# EAGLE board board (EAGLE 9.6.2)
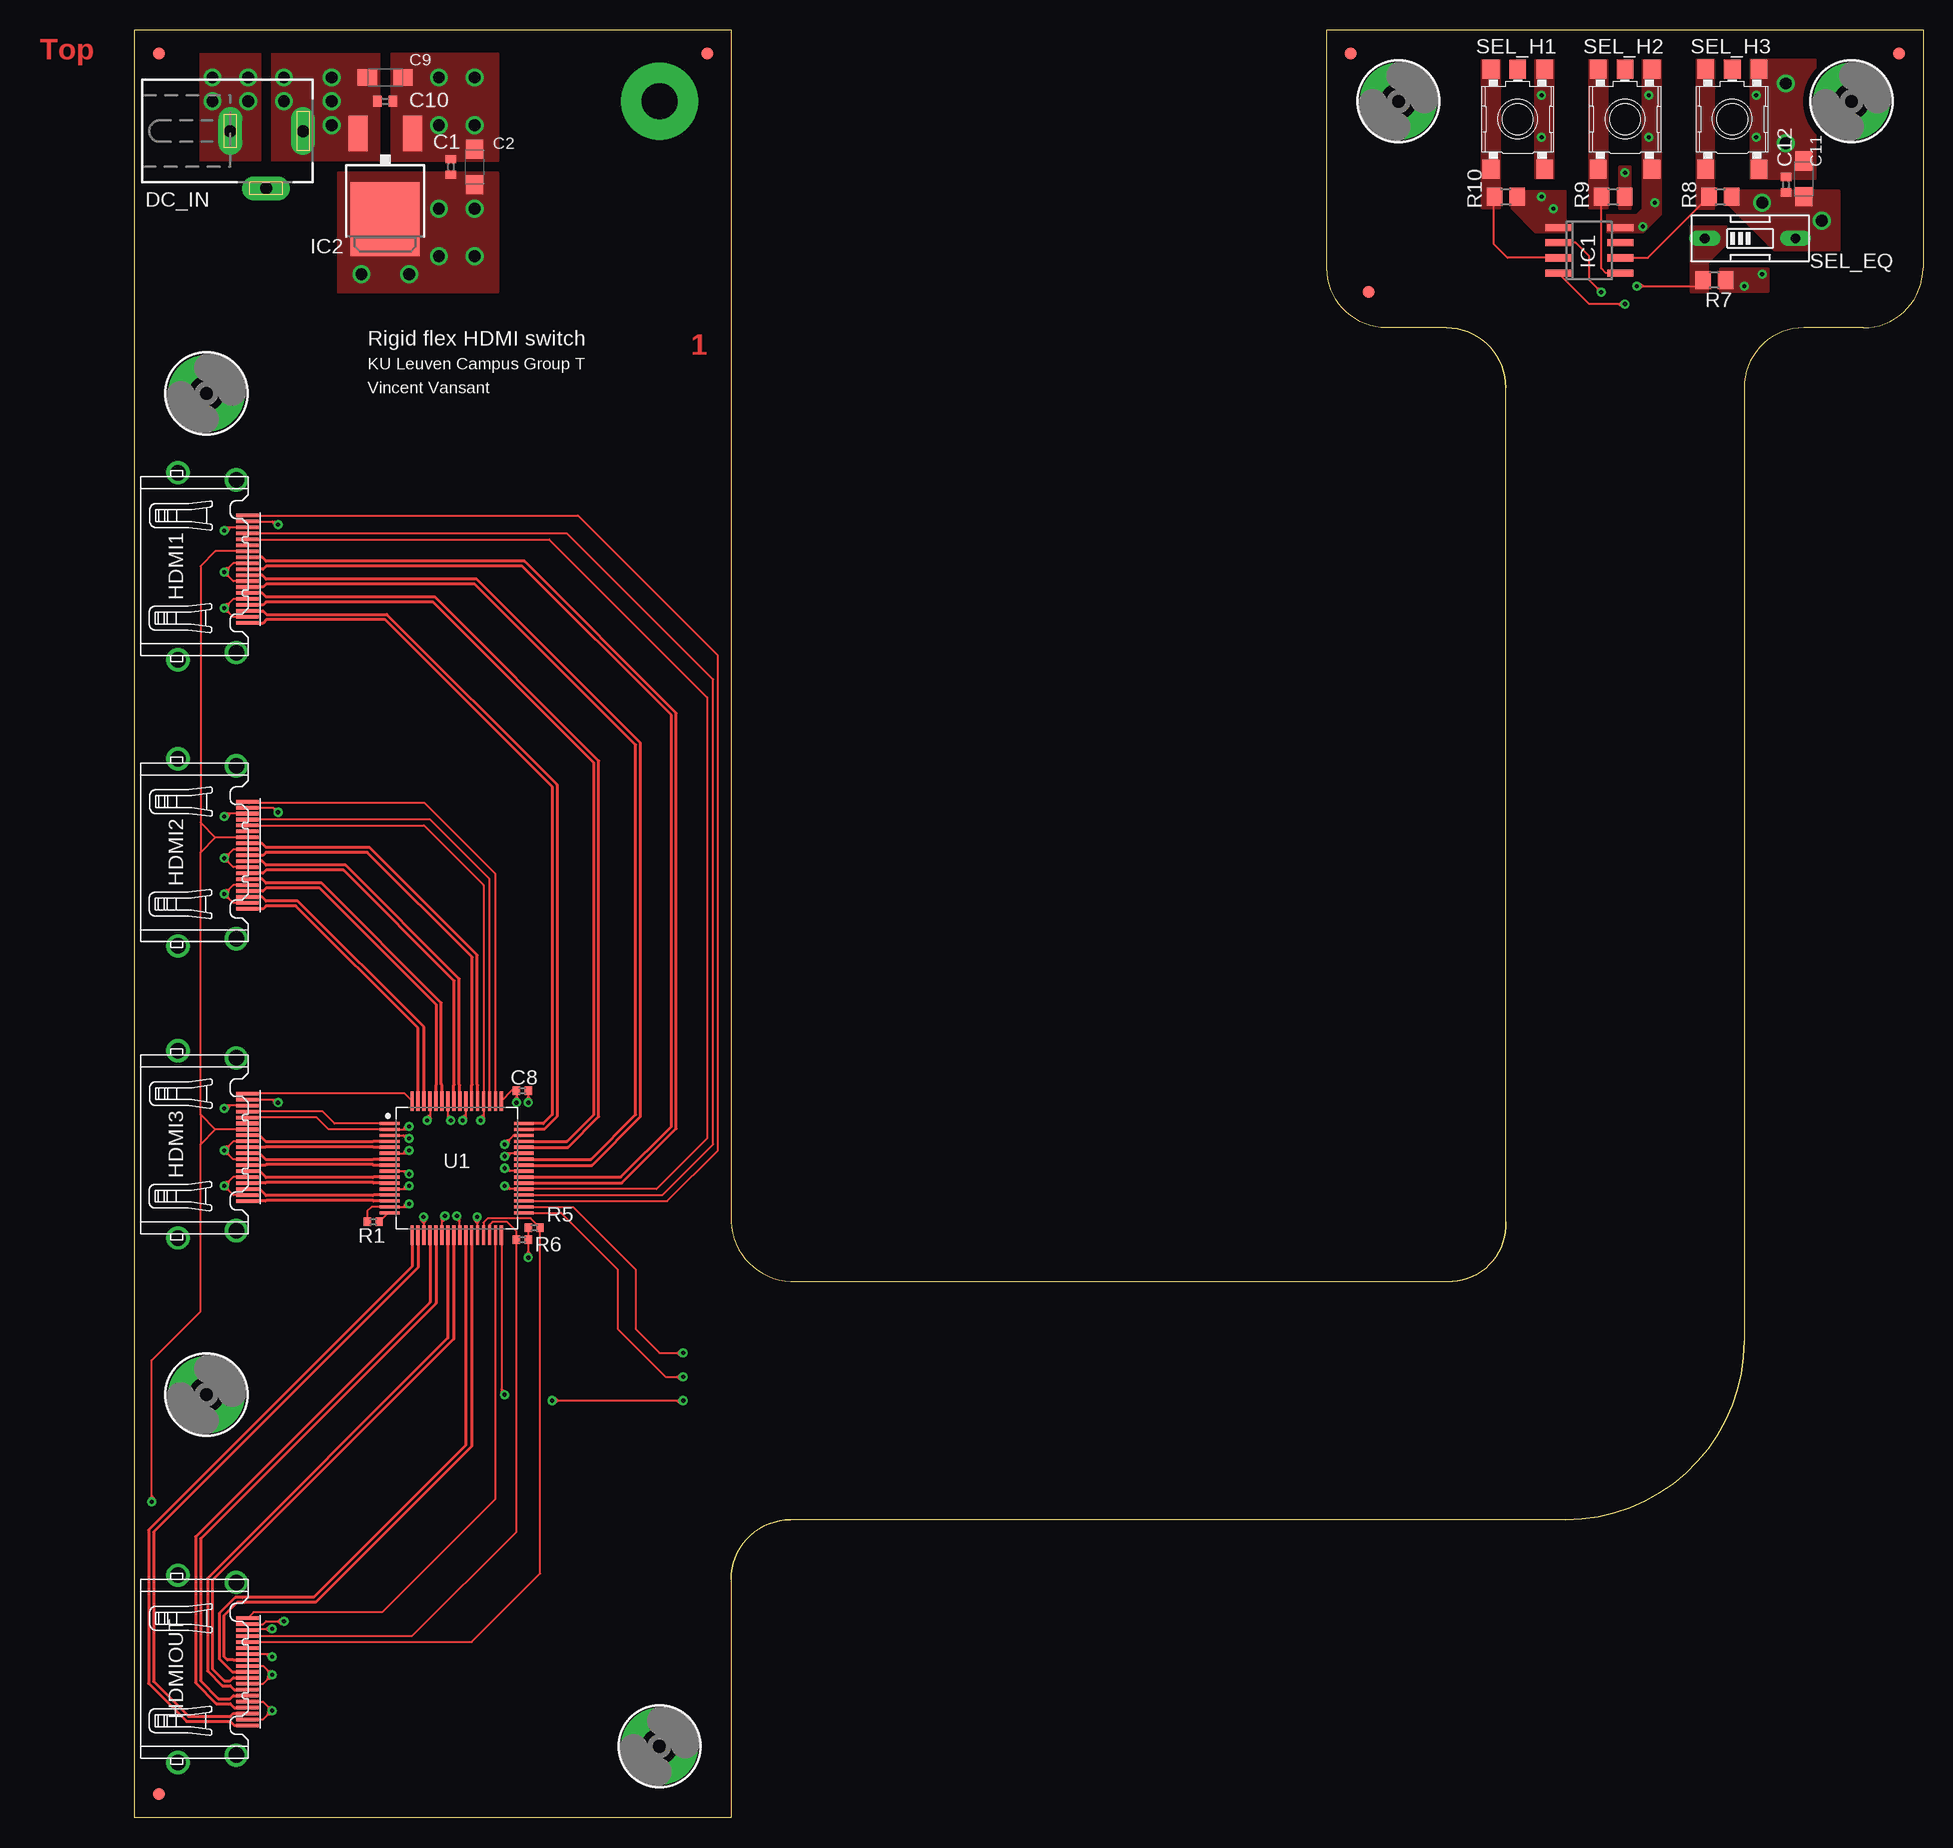
[diagram p0: board, top side]
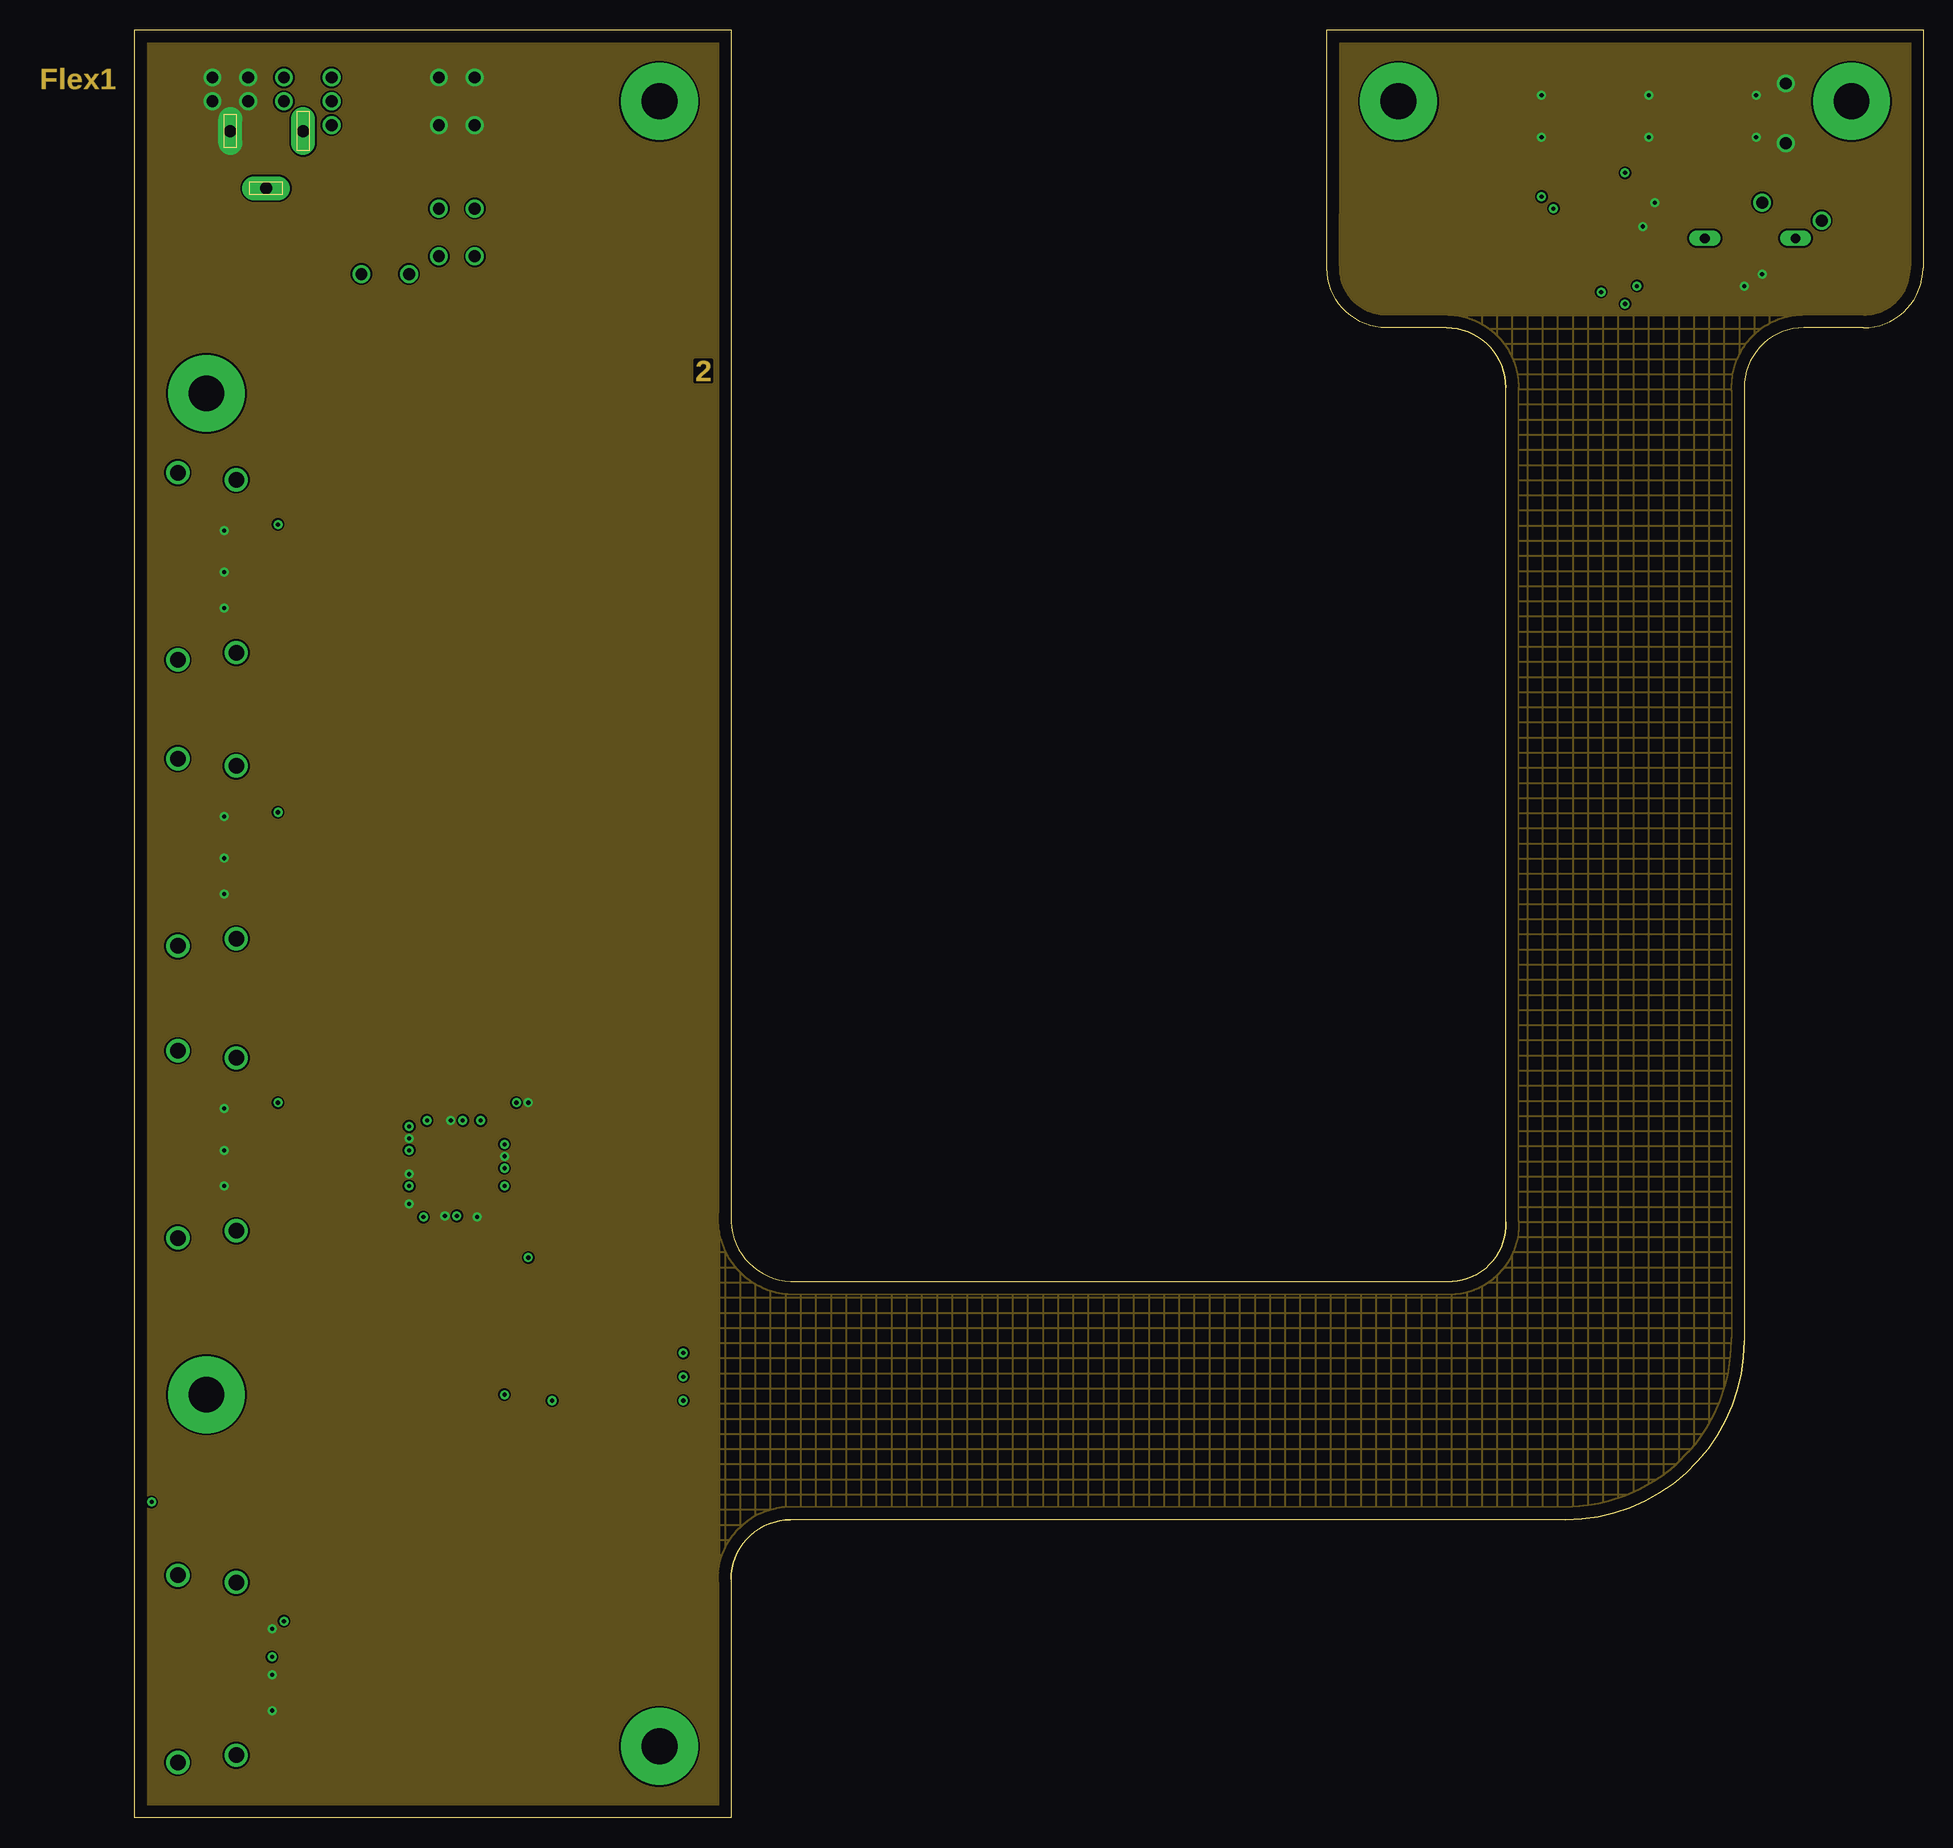
[diagram p1: board, inner layer Flex1]
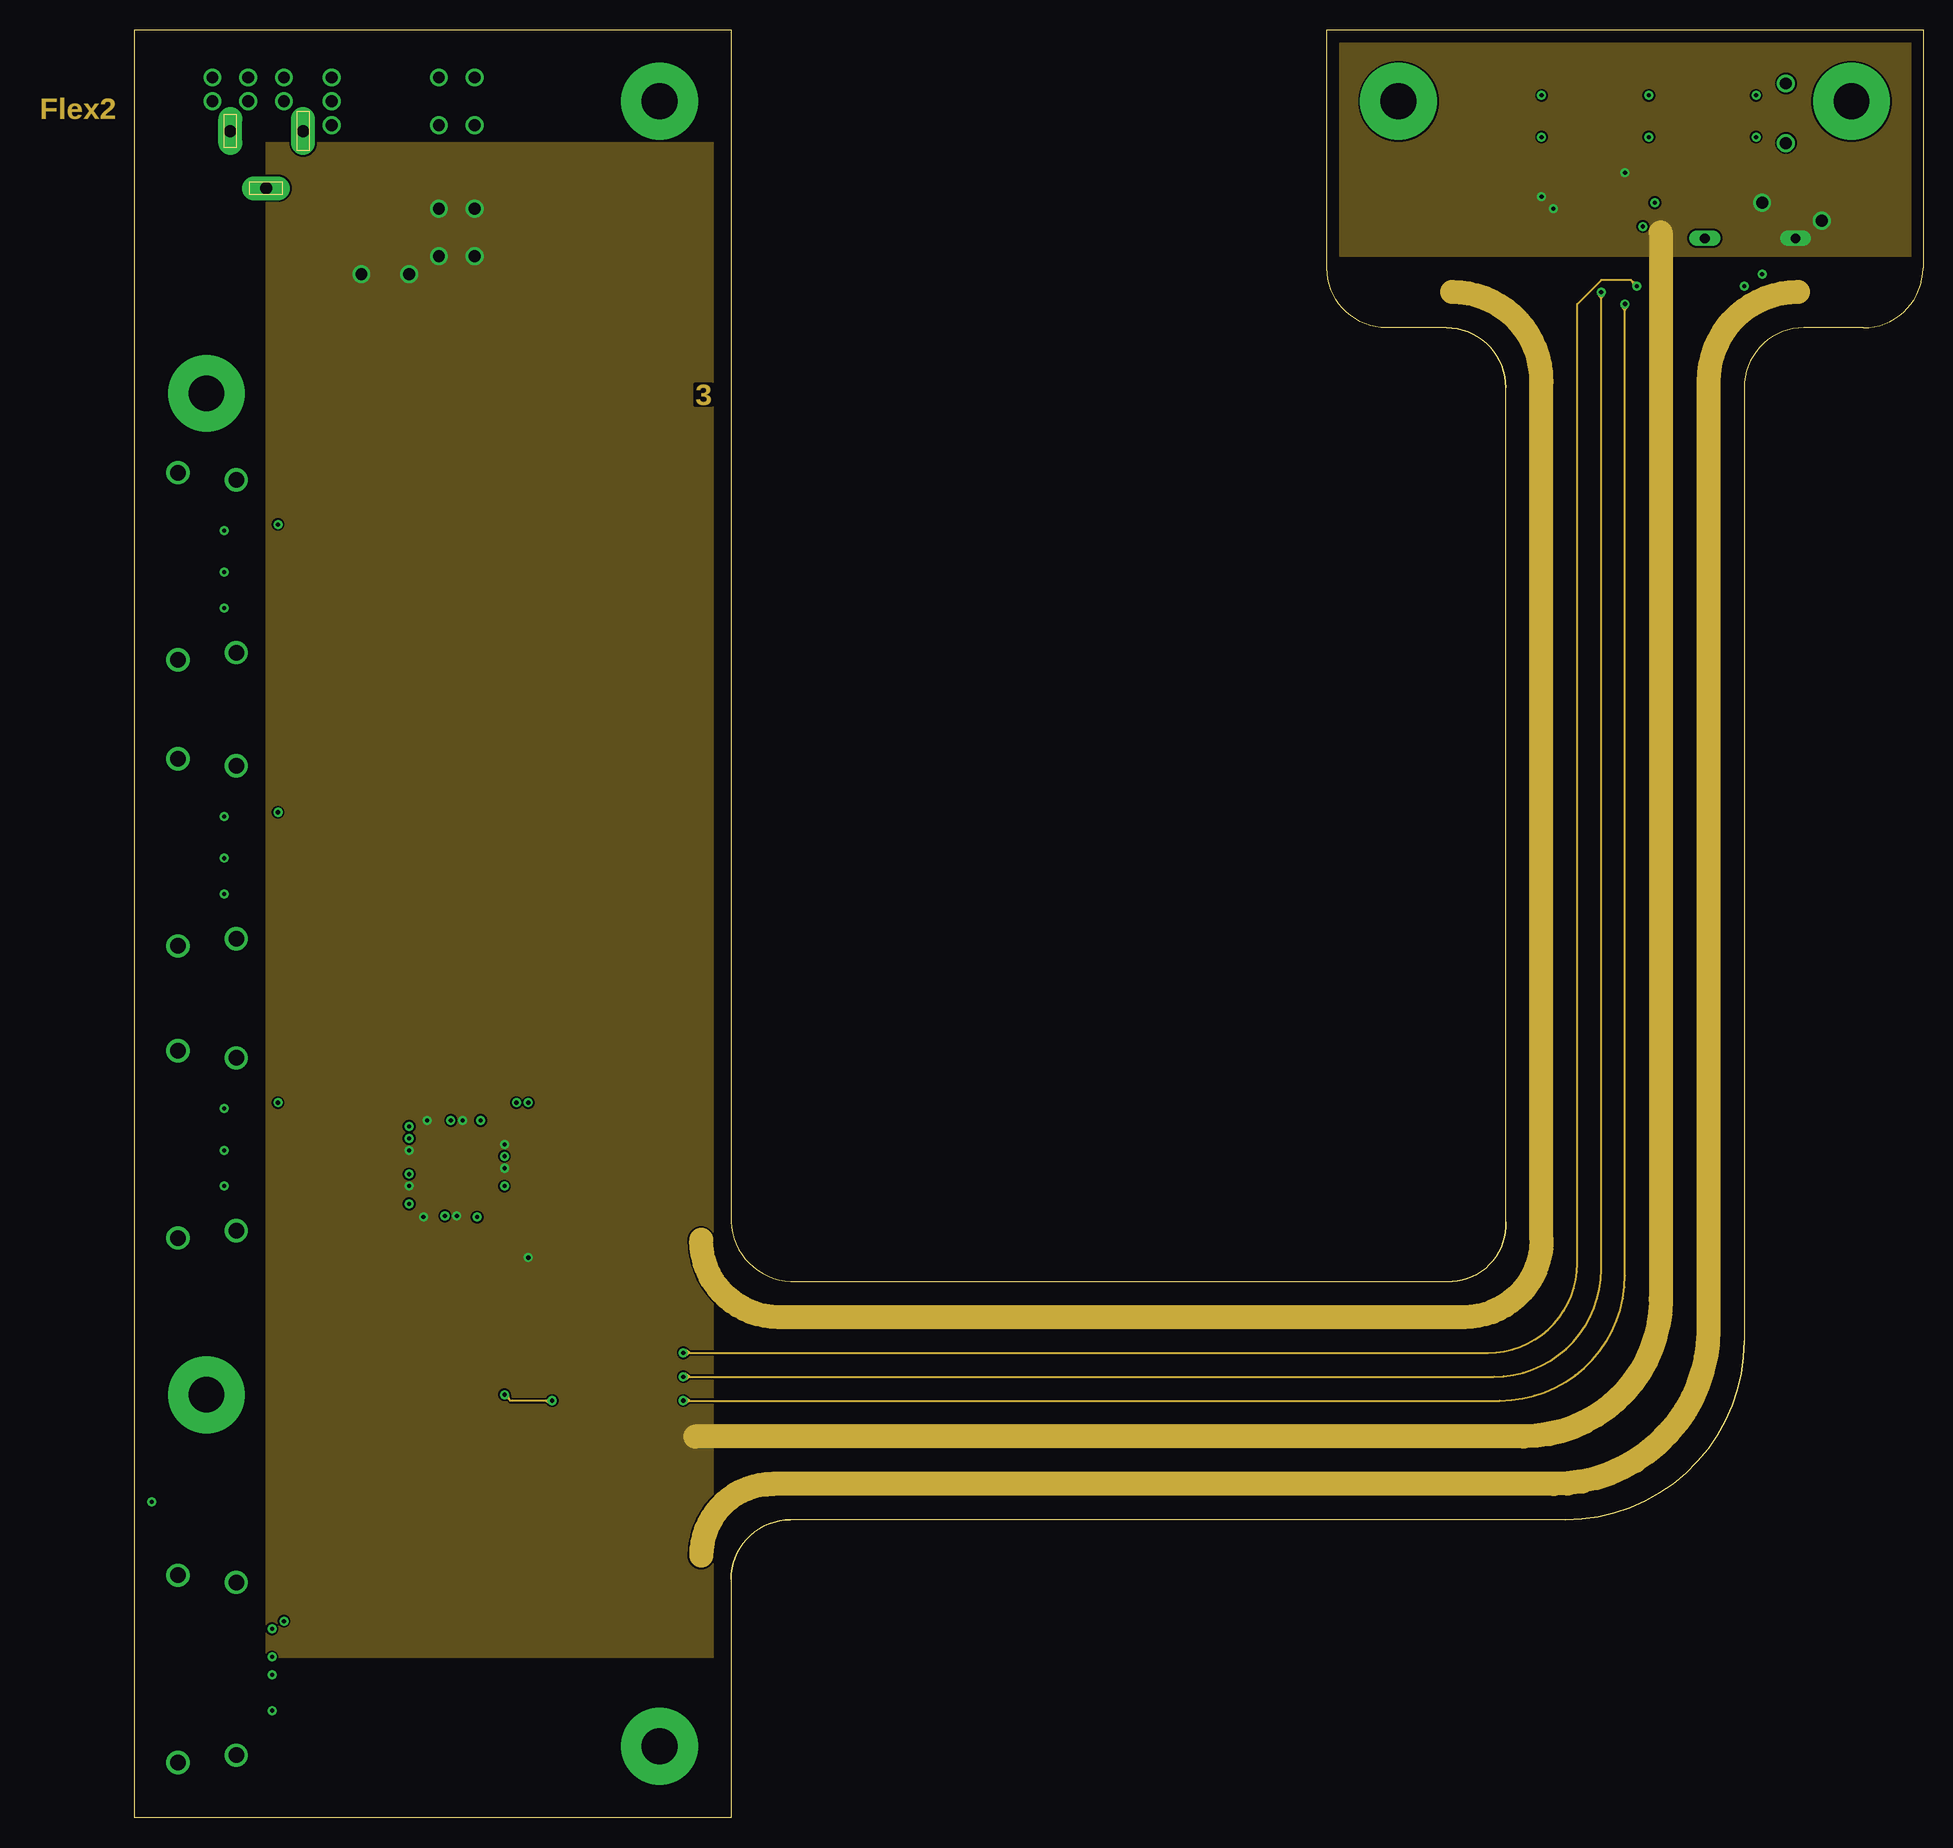
[diagram p2: board, inner layer Flex2]
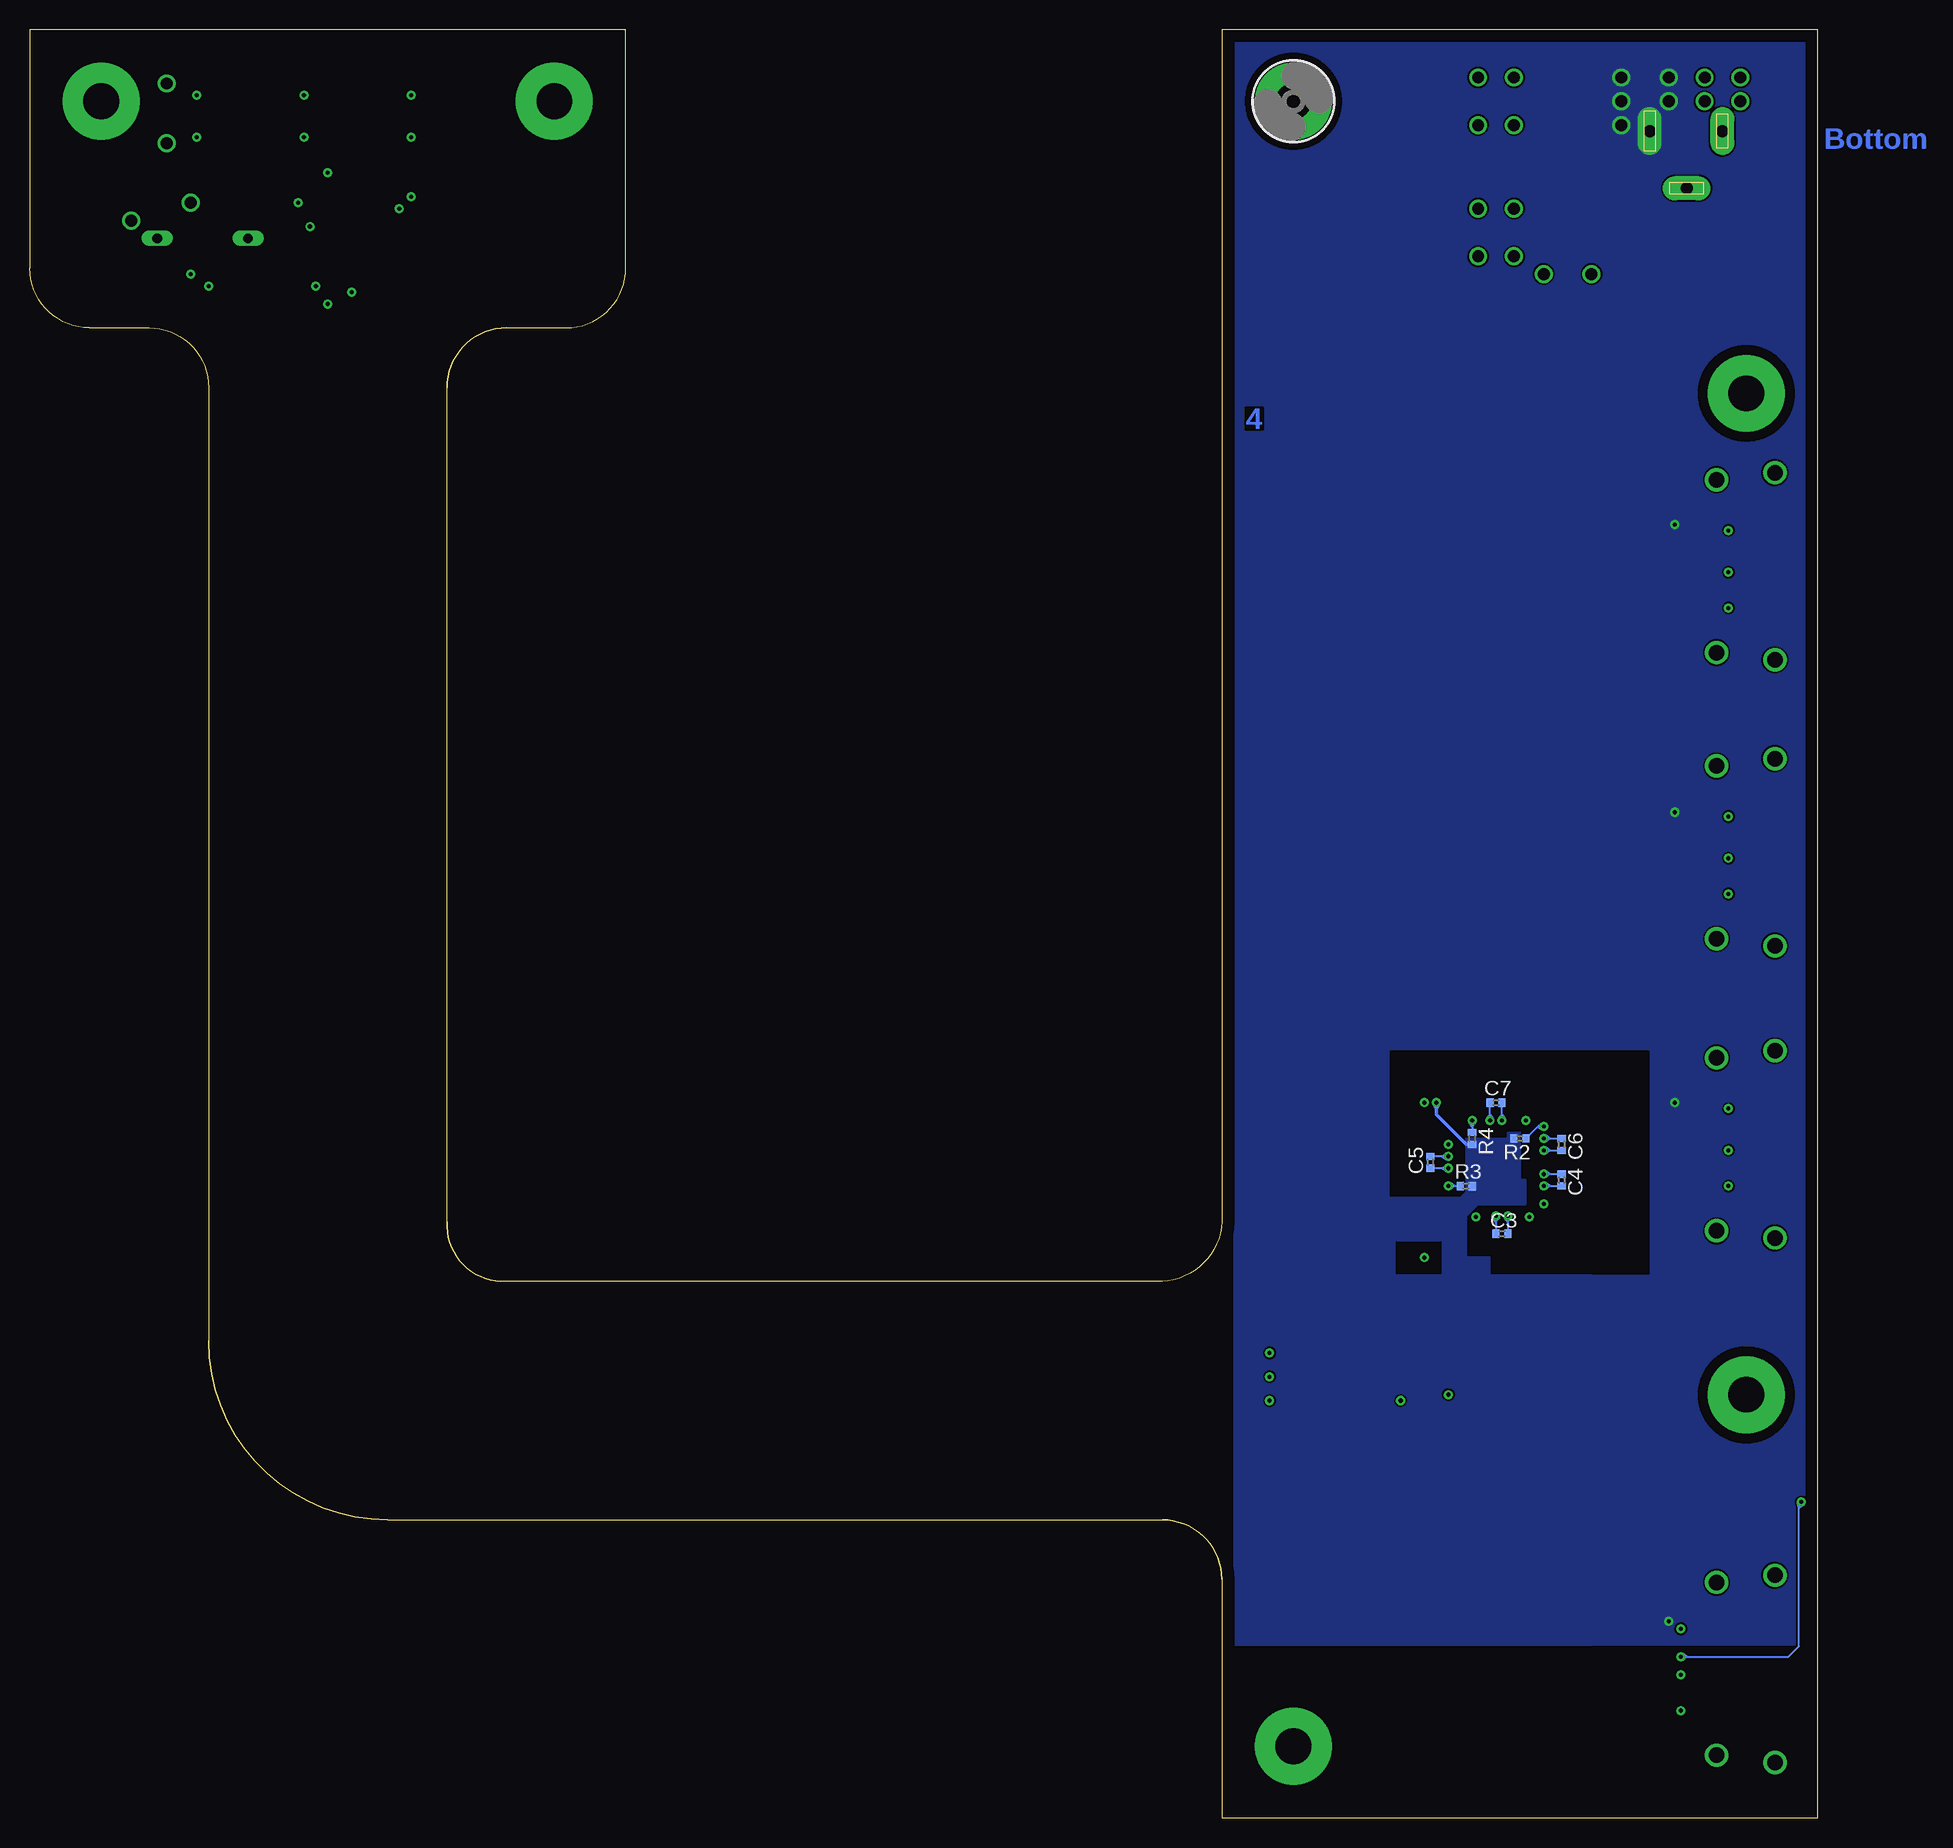
[diagram p3: board, bottom side, seen from below]

Size 150 x 150 mm. Coordinates in mm from the lower left corner, seen from the top.
Outline: 50,20 arc-90 55,25
Outline: 50,50.5 arc90 55,45
Outline: 110,125 arc-90 115,120
Outline: 140,125 arc90 135,120
Outline: 115,50 arc-90 110.5,45
Outline: 120,25 arc90 135,40
Outline: 50,50.5 50,150 0,150 0,0 50,0 50,20
Outline: 50,50.5 arc90 55,45
Outline: 55,45 110.5,45
Outline: 110.5,45 arc90 115,50
Outline: 115,50 115,120
Outline: 115,120 arc90 110,125
Outline: 110,125 105,125 arc-90 100,130 100,150 150,150 150,130 arc-90 145,125 140,125
Outline: 140,125 arc90 135,120
Outline: 135,120 135,40
Outline: 135,40 arc-90 120,25
Outline: 120,25 55,25
Outline: 55,25 arc90 50,20
Copper layers (1+2*15+16): Top 0.03mm / dielectric 0.285mm / Flex1 0.017mm / dielectric 0.05mm / Flex2 0.017mm / dielectric 0.285mm / Bottom 0.03mm
Design rules "default *": minimum track width 6mil, minimum drill 0.35mm, track to track 6mil, track to pad 6mil, pad to pad 6mil, via to via 6mil, smd to smd 6mil, copper to edge 40mil, drill to drill 6mil, minimum pad ring 10mil, minimum via ring 8mil, stop-mask expansion 4mil, vias tented up to drill 0mil, thermal gap 10mil
Net classes: 1 diff100: width 0.26 mm, clearance 0.15 mm

## Footprints (pad centres in the part's own frame; a part is rotated, then mirrored left to right if it is on the bottom)
C0402 = smd 0.7 x 0.9: 1 -0.65,0; 2 0.65,0
SMC_A = smd 1.6 x 1.4: + -1.5,0; - 1.5,0
0402 = smd 0.6 x 0.7: 1 -0.5,0; 2 0.5,0
DCJ0303 = drill 1 pad 2 long: 1 0,3.1; 2 4.8,0; 3 0,-3
FIDUCIAL_1MM = smd 1 x 1: 1 0,0
HDMI_A = smd 0.3 x 1.9: P$1 4.75,3.95; P$2 4.25,3.95; P$3 3.75,3.95; P$4 3.25,3.95; P$5 2.75,3.95; P$6 2.25,3.95; P$7 1.75,3.95; P$8 1.25,3.95; P$9 0.75,3.95; P$10 0.25,3.95; P$11 -0.25,3.95; P$12 -0.75,3.95; P$13 -1.25,3.95; P$14 -1.75,3.95; P$15 -2.25,3.95; P$16 -2.75,3.95; P$17 -3.25,3.95; P$18 -3.75,3.95; P$19 -4.25,3.95 | drill 1.3: P$20 -7.25,3; P$21 7.25,3; P$22 7.85,-1.9; P$23 -7.85,-1.9
SO-08 = smd 0.6 x 2.2: 1 -1.905,-2.6; 2 -0.635,-2.6; 3 0.635,-2.6; 4 1.905,-2.6; 5 1.905,2.6; 6 0.635,2.6; 7 -0.635,2.6; 8 -1.905,2.6
DPACK = smd 1.6 x 3: 1 -2.28,-4.8; 3 2.28,-4.8 | smd 5.8 x 6.2: 4 0,2.38
R0805 = smd 1.3 x 1.5: 1 -0.95,0; 2 0.95,0
EDG-01 = drill 0.813 long: 1 0,-3.81; 2 0,3.81
SKHMPXE010 = smd 1.6 x 1.4: 1 -4.2,2.25; 2 4.2,2.25; 3 -4.2,-2.25; 4 4.2,-2.25; 5 4.2,0
QFP50P1200X1200X120-64 = smd 1.652 x 0.28: 1 -5.632,3.75; 2 -5.632,3.25; 3 -5.632,2.75; 4 -5.632,2.25; 5 -5.632,1.75; 6 -5.632,1.25; 7 -5.632,0.75; 8 -5.632,0.25; 9 -5.632,-0.25; 10 -5.632,-0.75; 11 -5.632,-1.25; 12 -5.632,-1.75; 13 -5.632,-2.25; 14 -5.632,-2.75; 15 -5.632,-3.25; 16 -5.632,-3.75; 33 5.632,-3.75; 34 5.632,-3.25; 35 5.632,-2.75; 36 5.632,-2.25; 37 5.632,-1.75; 38 5.632,-1.25; 39 5.632,-0.75; 40 5.632,-0.25; 41 5.632,0.25; 42 5.632,0.75; 43 5.632,1.25; 44 5.632,1.75; 45 5.632,2.25; 46 5.632,2.75; 47 5.632,3.25; 48 5.632,3.75 | smd 0.28 x 1.652: 17 -3.75,-5.632; 18 -3.25,-5.632; 19 -2.75,-5.632; 20 -2.25,-5.632; 21 -1.75,-5.632; 22 -1.25,-5.632; 23 -0.75,-5.632; 24 -0.25,-5.632; 25 0.25,-5.632; 26 0.75,-5.632; 27 1.25,-5.632; 28 1.75,-5.632; 29 2.25,-5.632; 30 2.75,-5.632; 31 3.25,-5.632; 32 3.75,-5.632; 49 3.75,5.632; 50 3.25,5.632; 51 2.75,5.632; 52 2.25,5.632; 53 1.75,5.632; 54 1.25,5.632; 55 0.75,5.632; 56 0.25,5.632; 57 -0.25,5.632; 58 -0.75,5.632; 59 -1.25,5.632; 60 -1.75,5.632; 61 -2.25,5.632; 62 -2.75,5.632; 63 -3.25,5.632; 64 -3.75,5.632
MOUNTINGHOLE_3.0_PLATED = drill 3 pad 6.452: P$1 0,0

## Placement (x,y rotation side)
C1  10n  [C0402]  26.5,138.5 90 top
C2  47u  [SMC_A]  28.5,138.5 90 top
C3  10n  [0402]  26.5,49 0 bottom
C4  10n  [0402]  21.5,53.5 90 bottom
C5  10n  [0402]  32.5,55 90 bottom
C6  10n  [0402]  21.5,56.5 90 bottom
C7  10n  [0402]  27,60 0 bottom
C8  100n  [0402]  32.5,61 0 top
C9  47u  [SMC_A]  21,146 0 top
C10  100n  [C0402]  21,144 0 top
C11  47u  [SMC_A]  140,137.5 90 top
C12  100n  [C0402]  138.5,137 90 top
DC_IN  [DCJ0303]  11,141.5 270 top
FID1  FIDUCIAL""  [FIDUCIAL_1MM]  2,148 0 top
FID2  FIDUCIAL""  [FIDUCIAL_1MM]  2,2 0 top
FID3  FIDUCIAL""  [FIDUCIAL_1MM]  48,148 0 top
FID4  FIDUCIAL""  [FIDUCIAL_1MM]  102,148 0 top
FID5  FIDUCIAL""  [FIDUCIAL_1MM]  148,148 0 top
FID6  FIDUCIAL""  [FIDUCIAL_1MM]  103.5,128 0 top
HDMI1  HDMI-A  [HDMI_A]  5.5,105 270 top
HDMI2  HDMI-A  [HDMI_A]  5.5,81 270 top
HDMI3  HDMI-A  [HDMI_A]  5.5,56.5 270 top
HDMIOUT  HDMI-A  [HDMI_A]  5.5,12.5 270 top
IC1  PIC12F675SN  [SO-08]  122,131.5 270 top
IC2  LD117ADT-TR  [DPACK]  21,136.5 180 top
R1  4k02  [0402]  20,50 0 top
R2  47k  [0402]  25,57 180 bottom
R3  47k  [0402]  29.5,53 0 bottom
R4  47k  [0402]  29,57 270 bottom
R5  4k7  [0402]  33.5,49.5 180 top
R6  4k7  [0402]  32.5,48.5 0 top
R7  [R0805]  132.5,129 180 top
R8  [R0805]  133,136 0 top
R9  [R0805]  124,136 0 top
R10  [R0805]  115,136 0 top
SEL_EQ  [EDG-01]  135.5,132.5 270 top
SEL_H1  SKHMPSE010  [SKHMPXE010]  116,142.5 90 top
SEL_H2  SKHMPSE010  [SKHMPXE010]  125,142.5 90 top
SEL_H3  SKHMPSE010  [SKHMPXE010]  134,142.5 90 top
U1  TMDS351TQFP64  [QFP50P1200X1200X120-64]  27,54.5 0 top
U$1  MOUNTINGHOLE3.0  [MOUNTINGHOLE_3.0_PLATED]  44,6 0 top
U$2  MOUNTINGHOLE3.0  [MOUNTINGHOLE_3.0_PLATED]  44,144 0 bottom
U$31  MOUNTINGHOLE3.0  [MOUNTINGHOLE_3.0_PLATED]  6,35.5 0 top
U$32  MOUNTINGHOLE3.0  [MOUNTINGHOLE_3.0_PLATED]  6,119.5 0 top
U$33  MOUNTINGHOLE3.0  [MOUNTINGHOLE_3.0_PLATED]  144,144 0 top
U$34  MOUNTINGHOLE3.0  [MOUNTINGHOLE_3.0_PLATED]  106,144 0 top

## Library data of the parts
C1 C2 C9-C12 = rcl; SPICEPREFIX: C
C3-C8 HDMI1-HDMI3 HDMIOUT R1-R6 U1 = labHDE_rev3
DC_IN = con-jack; OC_FARNELL: unknown; OC_NEWARK: unknown
FID1-FID6 U$1 U$2 U$31-U$34 = microbuilder; BOM: EXCLUDE
IC1 = microchip; MF: MICROCHIP; MPN: PIC12F675-E/SN; OC_FARNELL: 9759026; OC_NEWARK: 92C4341
IC2 = v-reg
R7-R10 = rcl; SPICEPREFIX: R
SEL_EQ = special
SEL_H1-SEL_H3 = switch

## Nets
+5V: C8.1 C9.+ C10.1 DC_IN.1 HDMI1.P$18 HDMI2.P$18 HDMI3.P$18 HDMIOUT.P$18 IC2.3 R2.2 R3.2 R4.2 U1.49
CEC: HDMI1.P$13 HDMI2.P$13 HDMI3.P$13 HDMIOUT.P$13
EQ: R7.2 SEL_EQ.1 U1.34
GND: C1.2 C2.- C3.2 C4.2 C5.2 C6.2 C7.2 C8.2 C9.- C10.2 C11.- C12.2 DC_IN.3 HDMI1.P$2 HDMI1.P$5 HDMI1.P$8 HDMI1.P$11 HDMI1.P$17 HDMI2.P$2 HDMI2.P$5 HDMI2.P$8 HDMI2.P$11 HDMI2.P$17 HDMI3.P$2 HDMI3.P$5 HDMI3.P$8 HDMI3.P$11 HDMI3.P$17 HDMIOUT.P$2 HDMIOUT.P$5 HDMIOUT.P$8 HDMIOUT.P$11 HDMIOUT.P$17 IC1.8 IC2.1 R1.1 R7.1 SEL_H1.3 SEL_H1.4 SEL_H2.3 SEL_H2.4 SEL_H3.3 SEL_H3.4 U1.3 U1.9 U1.15 U1.22 U1.28 U1.43 U1.58
H1_CLK_N [diff100]: HDMI1.P$12 U1.38
H1_CLK_P [diff100]: HDMI1.P$10 U1.39
H1_D0_N [diff100]: HDMI1.P$9 U1.41
H1_D0_P [diff100]: HDMI1.P$7 U1.42
H1_D1_N [diff100]: HDMI1.P$6 U1.44
H1_D1_P [diff100]: HDMI1.P$4 U1.45
H1_D2_N [diff100]: HDMI1.P$3 U1.47
H1_D2_P [diff100]: HDMI1.P$1 U1.48
H2_CLK_N [diff100]: HDMI2.P$12 U1.53
H2_CLK_P [diff100]: HDMI2.P$10 U1.54
H2_D0_N [diff100]: HDMI2.P$9 U1.56
H2_D0_P [diff100]: HDMI2.P$7 U1.57
H2_D1_N [diff100]: HDMI2.P$6 U1.59
H2_D1_P [diff100]: HDMI2.P$4 U1.60
H2_D2_N [diff100]: HDMI2.P$3 U1.62
H2_D2_P [diff100]: HDMI2.P$1 U1.63
H3_CLK_N [diff100]: HDMI3.P$12 U1.4
H3_CLK_P [diff100]: HDMI3.P$10 U1.5
H3_D0_N [diff100]: HDMI3.P$9 U1.7
H3_D0_P [diff100]: HDMI3.P$7 U1.8
H3_D1_N [diff100]: HDMI3.P$6 U1.10
H3_D1_P [diff100]: HDMI3.P$4 U1.11
H3_D2_N [diff100]: HDMI3.P$3 U1.13
H3_D2_P [diff100]: HDMI3.P$1 U1.14
HOUT_CLK_N [diff100]: HDMIOUT.P$12 U1.27
HOUT_CLK_P [diff100]: HDMIOUT.P$10 U1.26
HOUT_D0_N [diff100]: HDMIOUT.P$9 U1.24
HOUT_D0_P [diff100]: HDMIOUT.P$7 U1.23
HOUT_D1_N [diff100]: HDMIOUT.P$6 U1.21
HOUT_D1_P [diff100]: HDMIOUT.P$4 U1.20
HOUT_D2_N [diff100]: HDMIOUT.P$3 U1.18
HOUT_D2_P [diff100]: HDMIOUT.P$1 U1.17
N$25: HDMI3.P$19 U1.64
N$26: HDMI2.P$19 U1.50
N$27: HDMI1.P$19 U1.35
N$36: HDMIOUT.P$19 U1.31
N$37: HDMI3.P$16 U1.1
N$38: HDMI3.P$15 R2.1 U1.2
N$39: HDMI2.P$16 U1.51
N$40: HDMI2.P$15 R4.1 U1.52
N$41: HDMI1.P$15 R3.1 U1.37
N$42: HDMI1.P$16 U1.36
N$43: HDMIOUT.P$16 R6.1 U1.30
N$44: HDMIOUT.P$15 R5.1 U1.29
N$45: R1.2 U1.16
N$50: IC1.6 R8.1 SEL_H3.1 SEL_H3.2
N$51: IC1.5 R9.1 SEL_H2.1 SEL_H2.2
N$52: IC1.3 R10.1 SEL_H1.1 SEL_H1.2
S1: IC1.4 U1.32
S2: IC1.2 U1.33
VCC: C1.1 C2.+ C3.1 C4.1 C5.1 C6.1 C7.1 C11.+ C12.1 IC1.1 IC2.4 R5.2 R6.2 R8.2 R9.2 R10.2 SEL_EQ.2 U1.6 U1.12 U1.19 U1.25 U1.40 U1.46 U1.55 U1.61

## Tracks (layer width: path | path; a pad name or v marks a point on that pad's centre or on a via)
+5V  (via drill 0.35, 1)
  Top 0.152: U1.49 31.62,61 C8.1 32,60.52 | 32,60.52 | 32,60.52 v32,60 | HDMIOUT.P$18 10.75,16.25 11,16.5 11.97,16.5 | 11.97,16.5 | 11.97,16.5 v12.5,16.5 | HDMI3.P$18 11.54,60.25 | 11.54,60.25 11.75,60.25 v12,60 | HDMI2.P$18 11.61,84.75 11.63,84.73 | 11.63,84.73 v12,84.36 | HDMI1.P$18 11.54,108.75 | 11.54,108.75 11.75,108.75 v12,108.5 | 32,60.52 | 32,60.52 31.75,60.17 | 31.75,60.17 | 32,60.52 32.25,60.17 | 32.25,60.17 | 32,60.52 31.75,60.17 | 31.75,60.17 | v32,60 31.75,60.17 | 32,60.52 32.25,60.17 | v32,60 32.25,60.17 | 32,60.52 31.75,60.17 | v32,60 31.75,60.17 | 32,60.52 32.25,60.17 | v32,60 32.25,60.17 | 11.97,16.5 12.33,16.25 | 12.33,16.25 | 11.97,16.5 | 11.97,16.5 12.33,16.75 | 12.33,16.75 | 11.97,16.5 12.33,16.25 | 12.33,16.25 | v12.5,16.5 12.33,16.25 | 11.97,16.5 12.33,16.75 | v12.5,16.5 12.33,16.75 | 11.97,16.5 12.33,16.25 | v12.5,16.5 12.33,16.25 | 11.97,16.5 12.33,16.75 | v12.5,16.5 12.33,16.75 | 11.54,60.25 11.73,59.87 v12,60 | 11.54,60.25 11.96,60.3 v12,60 | 11.63,84.73 11.7,84.31 v12,84.36 | 11.63,84.73 12.05,84.65 v12,84.36 | 11.54,108.75 11.73,108.37 v12,108.5 | 11.54,108.75 11.96,108.8 v12,108.5
  Bottom 0.29: v32,60 32,59.48 | 32,59.48 32,59 29.5,56.5 R4.2 | 32,59.48 32.21,59.9 | 32.21,59.9 | 32,59.48 31.79,59.9 | 31.79,59.9 | 32,59.48 32.21,59.9 | 32.21,59.9 | 32,59.48 31.79,59.9 | v32,60 31.79,59.9 | 32,59.48 32.21,59.9 | v32,60 32.21,59.9 | 32,59.48 31.79,59.9 | v32,60 31.79,59.9
  other vias: 16.5,146 16.5,142 12.5,146 12.5,144 16.5,144
  pour Bottom (no thermals): 25,57.5 25,52 29.5,52 29.5,57 26,57 26,57.5
  pour Top (no thermals): 20.5,148 20.5,139 11.5,139 11.5,148
  pour Bottom: 31.5,45 27.5,45 27.5,47 29.5,47 29.5,50.5 28.5,51.5 24.5,51.5 24.5,53.5 29.5,53.5 29.5,52.5 30,52 36,52 36,48.5 31.5,48.5
  pour Bottom (no thermals): 36,52 36,64.5 1,64.5 1,149 49,149 49,14.5 19,14.5 19,45.5 35.5,45.5 35.5,52
  pour Bottom: 19.5,45.5 14,45.5 14,65 1,65 1,14.5 19.5,14.5
CEC  (via drill 0.35)
  Top 0.152: HDMI1.P$13 6.75,106.25 5.5,105 5.5,83.5 | 6.75,82.25 5.5,83.5 | HDMI2.P$13 6.75,82.25 | 5.5,83.5 5.5,81 | 6.75,82.25 5.5,81 | HDMI3.P$13 6.75,57.75 | 5.5,59 6.75,57.75 | 5.5,59 5.5,81 | 5.5,59 5.5,56.5 | 6.75,57.75 5.5,56.5 | 5.5,56.5 5.5,42.5 1.39,38.39 1.39,27.02 | HDMIOUT.P$13 11.04,13.75 | 11.04,13.75 11.25,13.75 v11.5,13.5 | v1.39,26.5 1.39,27.02 | 1.39,27.02 | 11.04,13.75 11.23,13.37 v11.5,13.5 | 11.04,13.75 11.46,13.8 v11.5,13.5 | 1.39,27.02 | 1.39,27.02 1.15,26.67 | 1.15,26.67 | 1.39,27.02 1.64,26.67 | 1.64,26.67 | 1.39,27.02 1.15,26.67 | 1.15,26.67 | v1.39,26.5 1.15,26.67 | 1.39,27.02 1.64,26.67 | v1.39,26.5 1.64,26.67 | 1.39,27.02 1.15,26.67 | v1.39,26.5 1.15,26.67 | 1.39,27.02 1.64,26.67 | v1.39,26.5 1.64,26.67
  Bottom 0.152: v11.5,13.5 10.97,13.5 | 10.97,13.5 | 10.97,13.5 2.5,13.5 1.59,14.41 1.59,26.01 | 1.59,26.01 1.59,26.3 v1.39,26.5 | 10.97,13.5 11.33,13.25 | 11.33,13.25 | 10.97,13.5 | 10.97,13.5 11.33,13.75 | 11.33,13.75 | 10.97,13.5 11.33,13.25 | 11.33,13.25 | v11.5,13.5 11.33,13.25 | 10.97,13.5 11.33,13.75 | v11.5,13.5 11.33,13.75 | 10.97,13.5 11.33,13.25 | v11.5,13.5 11.33,13.25 | 10.97,13.5 11.33,13.75 | v11.5,13.5 11.33,13.75 | 1.59,26.01 1.69,26.43 v1.39,26.5 | 1.59,26.01 1.23,26.25 v1.39,26.5
EQ  (via drill 0.35)
  Top 0.152: R7.2 131.05,128.5 126.53,128.5 | U1.34 36.75,51.25 42,46 42,41 44,39 45.48,39 | 45.48,39 | 45.48,39 v46,39 | v126,128.5 126.53,128.5 | 126.53,128.5 | 45.48,39 45.83,38.75 | 45.83,38.75 | 45.48,39 | 45.48,39 45.83,39.25 | 45.83,39.25 | 45.48,39 45.83,38.75 | 45.83,38.75 | v46,39 45.83,38.75 | 45.48,39 45.83,39.25 | v46,39 45.83,39.25 | 45.48,39 45.83,38.75 | v46,39 45.83,38.75 | 45.48,39 45.83,39.25 | v46,39 45.83,39.25 | 126.53,128.5 126.17,128.75 | 126.17,128.75 | 126.53,128.5 | 126.53,128.5 126.17,128.25 | 126.17,128.25 | 126.53,128.5 126.17,128.75 | 126.17,128.75 | v126,128.5 126.17,128.75 | 126.53,128.5 126.17,128.25 | v126,128.5 126.17,128.25 | 126.53,128.5 126.17,128.75 | v126,128.5 126.17,128.75 | 126.53,128.5 126.17,128.25 | v126,128.5 126.17,128.25
  Flex2 0.152: v46,39 46.52,39 | 46.52,39 | 46.52,39 113.5,39 arc90 121,46.5 121,127 123,129 125.5,129 125.63,128.87 | 125.63,128.87 v126,128.5 | 46.52,39 | 46.52,39 46.17,39.25 | 46.17,39.25 | 46.52,39 46.17,38.75 | 46.17,38.75 | 46.52,39 46.17,39.25 | 46.17,39.25 | v46,39 46.17,39.25 | 46.52,39 46.17,38.75 | v46,39 46.17,38.75 | 46.52,39 46.17,39.25 | v46,39 46.17,39.25 | 46.52,39 46.17,38.75 | v46,39 46.17,38.75 | 125.63,128.87 125.7,128.45 v126,128.5 | 125.63,128.87 126.05,128.8 v126,128.5
  pour Top (no thermals): 132,128 132,130.5 133.5,132 133.5,133.5 130.5,133.5 130.5,128
GND  (via drill 0.35, 1)
  Top 0.152: R1.1 19.5,50.9 19.85,51.25 U1.15 22.54,51.25 | U1.28 28.75,49.88 | 28.75,49.88 28.75,50.35 v28.7,50.4 | C8.2 33,60.52 | 33,60.52 | 33,60.52 v33,60 | U1.43 31.46,55.75 | 31.46,55.75 31.25,55.75 v31,55.5 | U1.22 25.75,50.04 | 25.75,50.04 25.75,50.25 v26,50.5 | U1.58 26.25,58.96 | 26.25,58.96 26.25,58.75 v26.5,58.5 | U1.3 22.54,57.25 | 22.54,57.25 22.75,57.25 v23,57 | U1.9 22.54,54.25 | 22.54,54.25 22.75,54.25 v23,54 | 22.54,51.25 22.75,51.25 v23,51.5 | HDMI3.P$2 8.25,52.25 7.87,52.63 | 7.87,52.63 v7.5,53 | HDMI3.P$5 8.25,53.75 7.87,53.37 | 7.87,53.37 v7.5,53 | HDMI3.P$8 8.25,55.25 7.87,55.63 | 7.87,55.63 v7.5,56 | HDMI3.P$11 8.25,56.75 7.87,56.37 | 7.87,56.37 v7.5,56 | HDMI3.P$17 7.96,59.75 | 7.96,59.75 7.75,59.75 v7.5,59.5 | HDMI2.P$2 8.25,76.75 7.87,77.13 | 7.87,77.13 v7.5,77.5 | HDMI2.P$5 8.25,78.25 7.87,77.87 | 7.87,77.87 v7.5,77.5 | HDMI2.P$8 8.25,79.75 7.87,80.13 | 7.87,80.13 v7.5,80.5 | HDMI2.P$11 8.25,81.25 7.87,80.87 | 7.87,80.87 v7.5,80.5 | HDMI2.P$17 7.96,84.25 | 7.96,84.25 7.75,84.25 v7.5,84 | HDMI1.P$2 8.25,100.75 7.87,101.13 | 7.87,101.13 v7.5,101.5 | HDMI1.P$5 8.25,102.25 7.87,101.87 | 7.87,101.87 v7.5,101.5 | HDMI1.P$8 8.25,103.75 7.87,104.13 | 7.87,104.13 v7.5,104.5 | HDMI1.P$11 8.25,105.25 7.87,104.87 | 7.87,104.87 v7.5,104.5 | HDMI1.P$17 7.96,108.25 | 7.96,108.25 7.75,108.25 v7.5,108 | HDMIOUT.P$17 9.56,15.86 10.97,15.86 | 10.97,15.86 | 10.97,15.86 v11.5,15.86 | HDMIOUT.P$11 10.75,12.75 11.13,12.37 | 11.13,12.37 v11.5,12 | HDMIOUT.P$8 10.75,11.25 11.13,11.63 | 11.13,11.63 v11.5,12 | HDMIOUT.P$5 10.75,9.75 11.13,9.37 | 11.13,9.37 v11.5,9 | HDMIOUT.P$2 10.75,8.25 11.13,8.63 | 11.13,8.63 v11.5,9 | 28.75,49.88 28.96,50.25 v28.7,50.4 | 28.75,49.88 28.47,50.2 v28.7,50.4
  Top 0.152: 33,60.52 | 33,60.52 32.75,60.17 | 32.75,60.17 | 33,60.52 33.25,60.17 | 33.25,60.17 | 33,60.52 32.75,60.17 | 32.75,60.17 | v33,60 32.75,60.17 | 33,60.52 33.25,60.17 | v33,60 33.25,60.17 | 33,60.52 32.75,60.17 | v33,60 32.75,60.17 | 33,60.52 33.25,60.17 | v33,60 33.25,60.17 | 31.46,55.75 31.04,55.8 v31,55.5 | 31.46,55.75 31.27,55.37 v31,55.5 | 25.75,50.04 26.13,50.23 v26,50.5 | 25.75,50.04 25.7,50.47 v26,50.5 | 26.25,58.96 26.2,58.53 v26.5,58.5 | 26.25,58.96 26.63,58.77 v26.5,58.5 | 22.54,57.25 22.73,56.87 v23,57 | 22.54,57.25 22.96,57.3 v23,57 | 22.54,54.25 22.73,53.87 v23,54 | 22.54,54.25 22.96,54.3 v23,54 | 22.54,51.25 22.96,51.2 v23,51.5 | 22.54,51.25 22.73,51.63 v23,51.5 | 7.87,52.63 7.8,53.05 v7.5,53 | 7.87,52.63 7.45,52.7 v7.5,53 | 7.87,53.37 7.45,53.3 v7.5,53 | 7.87,53.37 7.8,52.95 v7.5,53 | 7.87,55.63 7.8,56.05 v7.5,56 | 7.87,55.63 7.45,55.7 v7.5,56 | 7.87,56.37 7.45,56.3 v7.5,56 | 7.87,56.37 7.8,55.95 v7.5,56 | 7.96,59.75 7.54,59.8 v7.5,59.5 | 7.96,59.75 7.77,59.37 v7.5,59.5 | 7.87,77.13 7.8,77.55 v7.5,77.5 | 7.87,77.13 7.45,77.2 v7.5,77.5 | 7.87,77.87 7.45,77.8 v7.5,77.5 | 7.87,77.87 7.8,77.45 v7.5,77.5 | 7.87,80.13 7.8,80.55 v7.5,80.5 | 7.87,80.13 7.45,80.2 v7.5,80.5 | 7.87,80.87 7.45,80.8 v7.5,80.5 | 7.87,80.87 7.8,80.45 v7.5,80.5 | 7.96,84.25 7.54,84.3 v7.5,84 | 7.96,84.25 7.77,83.87 v7.5,84 | 7.87,101.13 7.8,101.55 v7.5,101.5 | 7.87,101.13 7.45,101.2 v7.5,101.5 | 7.87,101.87 7.45,101.8 v7.5,101.5 | 7.87,101.87 7.8,101.45 v7.5,101.5 | 7.87,104.13 7.8,104.55 v7.5,104.5 | 7.87,104.13 7.45,104.2 v7.5,104.5 | 7.87,104.87 7.45,104.8 v7.5,104.5 | 7.87,104.87 7.8,104.45 v7.5,104.5 | 7.96,108.25 7.54,108.3 v7.5,108 | 7.96,108.25 7.77,107.87 v7.5,108
  Top 0.152: 10.97,15.86 11.33,15.61 | 11.33,15.61 | 10.97,15.86 | 10.97,15.86 11.33,16.1 | 11.33,16.1 | 10.97,15.86 11.33,15.61 | 11.33,15.61 | v11.5,15.86 11.33,15.61 | 10.97,15.86 11.33,16.1 | v11.5,15.86 11.33,16.1 | 10.97,15.86 11.33,15.61 | v11.5,15.86 11.33,15.61 | 10.97,15.86 11.33,16.1 | v11.5,15.86 11.33,16.1 | 11.13,12.37 11.2,11.95 v11.5,12 | 11.13,12.37 11.55,12.3 v11.5,12 | 11.13,11.63 11.55,11.7 v11.5,12 | 11.13,11.63 11.2,12.05 v11.5,12 | 11.13,9.37 11.2,8.95 v11.5,9 | 11.13,9.37 11.55,9.3 v11.5,9 | 11.13,8.63 11.55,8.7 v11.5,9 | 11.13,8.63 11.2,9.05 v11.5,9
  Bottom 0.152: v31,55.5 31.52,55.5 | 31.52,55.5 | 31.52,55.5 C5.2 | v26,50.5 26,49.98 | 26,49.98 | 26,49.98 C3.2 | v26.5,58.5 26.5,59.02 | 26.5,59.02 | 26.5,59.02 C7.2 | v23,57 22.48,57 | 22.48,57 | 22.48,57 C6.2 | v23,54 22.48,54 | 22.48,54 | 22.48,54 C4.2 | 31.52,55.5 31.17,55.75 | 31.17,55.75 | 31.52,55.5 | 31.52,55.5 31.17,55.25 | 31.17,55.25 | 31.52,55.5 31.17,55.75 | 31.17,55.75 | v31,55.5 31.17,55.75 | 31.52,55.5 31.17,55.25 | v31,55.5 31.17,55.25 | 31.52,55.5 31.17,55.75 | v31,55.5 31.17,55.75 | 31.52,55.5 31.17,55.25 | v31,55.5 31.17,55.25 | 26,49.98 26.25,50.33 | 26.25,50.33 | 26,49.98 | 26,49.98 25.75,50.33 | 25.75,50.33 | 26,49.98 26.25,50.33 | 26.25,50.33 | v26,50.5 26.25,50.33 | 26,49.98 25.75,50.33 | v26,50.5 25.75,50.33 | 26,49.98 26.25,50.33 | v26,50.5 26.25,50.33 | 26,49.98 25.75,50.33 | v26,50.5 25.75,50.33 | 26.5,59.02 | 26.5,59.02 26.25,58.67 | 26.25,58.67 | 26.5,59.02 26.75,58.67 | 26.75,58.67 | 26.5,59.02 26.25,58.67 | 26.25,58.67 | v26.5,58.5 26.25,58.67 | 26.5,59.02 26.75,58.67 | v26.5,58.5 26.75,58.67 | 26.5,59.02 26.25,58.67 | v26.5,58.5 26.25,58.67 | 26.5,59.02 26.75,58.67 | v26.5,58.5 26.75,58.67 | 22.48,57 | 22.48,57 22.83,56.75 | 22.83,56.75 | 22.48,57 22.83,57.25 | 22.83,57.25 | 22.48,57 22.83,56.75 | 22.83,56.75 | v23,57 22.83,56.75 | 22.48,57 22.83,57.25 | v23,57 22.83,57.25 | 22.48,57 22.83,56.75 | v23,57 22.83,56.75 | 22.48,57 22.83,57.25 | v23,57 22.83,57.25 | 22.48,54 | 22.48,54 22.83,53.75 | 22.83,53.75 | 22.48,54 22.83,54.25 | 22.83,54.25 | 22.48,54 22.83,53.75 | 22.83,53.75 | v23,54 22.83,53.75 | 22.48,54 22.83,54.25 | v23,54 22.83,54.25 | 22.48,54 22.83,53.75 | v23,54 22.83,53.75 | 22.48,54 22.83,54.25 | v23,54 22.83,54.25
  other vias: 25.5,142 25.5,146 28.5,146 28.5,142 6.5,146 6.5,144 9.5,146 9.5,144 126.5,133.5 127.5,135.5 138.5,140.5 138.5,145.5 118,144.5 118,141 127,144.5 127,141 136,141 136,144.5 135,128.5 136.5,129.5
  pour Top (no thermals): 21.5,148 21.5,139 30.5,139 30.5,148
  pour Top (no thermals): 10.5,148 10.5,139 5.5,139 5.5,148
  pour Top (no thermals): 117.5,147.5 119,147.5 119,137.5 117.5,137.5
  pour Top (no thermals): 126.5,147.5 128,147.5 128,137.5 126.5,137.5
  pour Top (no thermals): 135.5,137.5 141,137.5 141,147.5 135.5,147.5
  pour Flex1 (no thermals): 1,149 49,149 49,1 1,1
  pour Flex1 (no thermals): 101,149 149,149 149,126 101,126
  pour Flex1 (no thermals, hatched): 101,126 101,125 110,125 arc-90 115,120 115,119.5 115,50 115,49.5 arc-90 110.5,45 56,45 55,45 arc-90 50,50 50,51 47.5,51 47.5,19 50,19 50,20 arc-90 55,25 118.5,25 120,25 arc90 135,40 135,114 135,119 135,120 arc-90 140,125 149,125 149,134.5 101,134.5
  pour Top (no thermals): 126.5,140 128,140 128,134.5 126.5,133 123.5,133 123.5,134.5 126,134.5 126.5,135
  pour Top (no thermals): 133,130 137,130 137,128 133,128
H1_CLK_N
  Top 0.26: U1.38 40.83,53.25 45.41,57.83 45.41,92.67 32.67,105.41 11,105.41 10.66,105.75 HDMI1.P$12
H1_CLK_P
  Top 0.26: U1.39 40.75,53.75 45,58 45,92.5 32.5,105 11,105 10.75,104.75 HDMI1.P$10
H1_D0_N
  Top 0.26: U1.41 38.33,54.75 42.41,58.83 42.41,90.17 28.67,103.91 11,103.91 10.66,104.25 HDMI1.P$9
H1_D0_P
  Top 0.26: U1.42 38.25,55.25 42,59 42,90 28.5,103.5 11,103.5 10.75,103.25 HDMI1.P$7
H1_D1_N
  Top 0.26: U1.44 36.33,56.25 38.91,58.83 38.91,88.67 25.17,102.41 11,102.41 10.66,102.75 HDMI1.P$6
H1_D1_P
  Top 0.26: U1.45 36.25,56.75 38.5,59 38.5,88.5 25,102 11,102 10.75,101.75 HDMI1.P$4
H1_D2_N
  Top 0.26: HDMI1.P$3 10.75,101.25 11.04,100.96 21.13,100.96 35.41,86.67 35.41,58.83 34.33,57.75 U1.47
H1_D2_P
  Top 0.26: HDMI1.P$1 10.75,100.25 11.04,100.54 20.96,100.54 35,86.5 35,59 34.25,58.25 U1.48
H2_CLK_N
  Top 0.26: U1.53 28.75,61.48 28.71,61.52 28.71,72.38 19.67,81.41 11,81.41 10.66,81.75 HDMI2.P$12
H2_CLK_P
  Top 0.26: U1.54 28.25,61.48 28.29,61.52 28.29,72.21 19.5,81 11,81 10.75,80.75 HDMI2.P$10
H2_D0_N
  Top 0.26: U1.56 27.25,61.48 27.21,61.52 27.21,70.38 17.67,79.91 11,79.91 10.66,80.25 HDMI2.P$9
H2_D0_P
  Top 0.26: U1.57 26.75,61.48 26.79,61.52 26.79,70.21 17.5,79.5 11,79.5 10.75,79.25 HDMI2.P$7
H2_D1_N
  Top 0.26: U1.59 25.75,61.48 25.71,61.52 25.71,68.38 15.67,78.41 11,78.41 10.66,78.75 HDMI2.P$6
H2_D1_P
  Top 0.26: U1.60 25.25,61.48 25.29,61.52 25.29,68.21 15.5,78 11,78 10.75,77.75 HDMI2.P$4
H2_D2_N
  Top 0.26: U1.62 24.25,66.33 13.67,76.91 11,76.91 10.66,77.25 HDMI2.P$3
H2_D2_P
  Top 0.26: U1.63 23.75,66.25 13.5,76.5 11,76.5 10.75,76.25 HDMI2.P$1
H3_CLK_N
  Top 0.26: U1.4 20.02,56.75 19.98,56.71 11,56.71 10.46,57.25 HDMI3.P$12
H3_CLK_P
  Top 0.26: U1.5 20.02,56.25 19.98,56.29 11,56.29 10.96,56.25 HDMI3.P$10
H3_D0_N
  Top 0.26: U1.7 20.02,55.25 19.98,55.21 11,55.21 10.46,55.75 HDMI3.P$9
H3_D0_P
  Top 0.26: U1.8 20.02,54.75 19.98,54.79 11,54.79 10.96,54.75 HDMI3.P$7
H3_D1_N
  Top 0.26: U1.10 20.02,53.75 19.98,53.71 11,53.71 10.46,54.25 HDMI3.P$6
H3_D1_P
  Top 0.26: U1.11 20.02,53.25 19.98,53.29 11,53.29 10.96,53.25 HDMI3.P$4
H3_D2_N
  Top 0.26: U1.13 20.02,52.25 19.98,52.21 11,52.21 10.46,52.75 HDMI3.P$3
H3_D2_P
  Top 0.26: U1.14 20.02,51.75 19.98,51.79 11,51.79 10.96,51.75 HDMI3.P$1
HOUT_CLK_N
  Top 0.26: U1.27 28.25,31.17 15.17,18.09 9.2,18.09 9.19,18.08 8.58,18.08 7.5,17 7.5,13.5 7.75,13.25 8.25,13.25 8.5,13.25 HDMIOUT.P$12
HOUT_CLK_P
  Top 0.26: U1.26 27.75,31.25 15,18.5 9.03,18.5 9.02,18.49 8.41,18.49 7.09,17.17 7.09,13.33 8.17,12.25 HDMIOUT.P$10
HOUT_D0_N
  Top 0.26: U1.24 26.75,40.17 6.5,19.92 6.5,12.5 7.5,11.5 8,11.5 8.25,11.75 HDMIOUT.P$9
HOUT_D0_P
  Top 0.26: U1.23 26.25,40.25 6.09,20.09 6.09,12.33 7.33,11.09 8,11.09 8.34,10.75 HDMIOUT.P$7
HOUT_D1_N
  Top 0.26: U1.21 25.25,43.17 5.5,23.42 5.5,11.5 7,10 8,10 8.25,10.25 HDMIOUT.P$6
HOUT_D1_P
  Top 0.26: U1.20 24.75,43.25 5.09,23.59 5.09,11.33 6.83,9.59 8,9.59 8.34,9.25 HDMIOUT.P$4
HOUT_D2_N
  Top 0.26: U1.18 23.75,46.17 1.56,23.98 1.56,11.44 4.5,8.5 8,8.5 8.25,8.75 HDMIOUT.P$3
HOUT_D2_P
  Top 0.26: U1.17 23.25,46.25 1.15,24.15 1.15,11.27 4.33,8.09 8,8.09 8.34,7.75 HDMIOUT.P$1
N$1
  Flex2 2: 139.5,128 arc90 132,120.5 132,41 arc-90 119,28 53.5,28 arc90 47.5,22
N$2
  Flex2 2: 110.5,128 arc-90 118,120.5 118,48.5 arc-90 111.5,42 54,42 arc-90 47.5,48.5
N$25
  Top 0.152: U1.64 22.63,60.75 HDMI3.P$19
N$26
  Top 0.152: HDMI2.P$19 9.57,85.13 24.3,85.13 30.25,79.18 U1.50
N$27
  Top 0.152: HDMI1.P$19 37.16,109.25 48.91,97.5 48.91,56 44.66,51.75 U1.35
N$36
  Top 0.152: HDMIOUT.P$19 9.95,17.25 20.75,17.25 30.25,26.75 U1.31
N$37
  Top 0.152: U1.1 16.75,58.25 15.75,59.25 HDMI3.P$16
N$38  (via drill 0.35)
  Top 0.152: 22.54,57.75 U1.2 16.25,57.75 15.25,58.75 HDMI3.P$15 | 22.54,57.75 22.75,57.75 v23,58 | 22.54,57.75 22.96,57.7 v23,58 | 22.54,57.75 22.73,58.13 v23,58
  Bottom 0.152: R2.1 23.52,57.98 | 23.52,57.98 23.5,58 v23,58 | 23.52,57.98 23.18,58.24 v23,58 | 23.52,57.98 23.16,57.74 v23,58
N$39
  Top 0.152: U1.51 29.75,78.75 24.75,83.75 HDMI2.P$16
N$40  (via drill 0.35)
  Top 0.152: 29.25,58.96 U1.52 29.25,78.25 24.25,83.25 HDMI2.P$15 | 29.25,58.96 29.25,58.75 v29,58.5 | 29.25,58.96 28.86,58.77 v29,58.5 | 29.25,58.96 29.3,58.53 v29,58.5
  Bottom 0.152: v29,58.5 29,57.98 | 29,57.98 | 29,57.98 R4.1 | 29,57.98 29.25,58.33 | 29.25,58.33 | 29,57.98 | 29,57.98 28.75,58.33 | 28.75,58.33 | 29,57.98 29.25,58.33 | 29.25,58.33 | v29,58.5 29.25,58.33 | 29,57.98 28.75,58.33 | v29,58.5 28.75,58.33 | 29,57.98 29.25,58.33 | v29,58.5 29.25,58.33 | 29,57.98 28.75,58.33 | v29,58.5 28.75,58.33
N$41  (via drill 0.35)
  Top 0.152: 31.46,52.75 U1.37 43.75,52.75 48,57 48,94 34.75,107.25 HDMI1.P$15 | 31.46,52.75 31.25,52.75 v31,53 | 31.46,52.75 31.27,53.13 v31,53 | 31.46,52.75 31.04,52.7 v31,53
  Bottom 0.152: v31,53 30.48,53 | 30.48,53 | 30.48,53 R3.1 | 30.48,53 | 30.48,53 30.83,52.75 | 30.83,52.75 | 30.48,53 30.83,53.25 | 30.83,53.25 | 30.48,53 30.83,52.75 | 30.83,52.75 | v31,53 30.83,52.75 | 30.48,53 30.83,53.25 | v31,53 30.83,53.25 | 30.48,53 30.83,52.75 | v31,53 30.83,52.75 | 30.48,53 30.83,53.25 | v31,53 30.83,53.25
N$42
  Top 0.152: U1.36 44.25,52.25 48.5,56.5 48.5,95.5 36.25,107.75 HDMI1.P$16
N$43
  Top 0.152: U1.30 29.75,49.74 30,49.99 31.2,49.99 32,49.2 R6.1 32,24 23.25,15.25 HDMIOUT.P$16
N$44
  Top 0.152: U1.29 29.25,49.95 29.6,50.3 33.2,50.3 R5.1 34,20.5 28.25,14.75 HDMIOUT.P$15
N$45
  Top 0.152: U1.16 21.25,50.75 R1.2
N$50
  Top 0.152: IC1.6 126.92,130.87 R8.1
  pour Top (no thermals): 132.5,147.5 131,147.5 131,135 132.5,135
N$51
  Top 0.152: IC1.5 123.41,129.59 123,130 123,135.95 R9.1
  pour Top (no thermals): 122,147.5 123.5,147.5 123.5,135 122,135
N$52
  Top 0.152: IC1.3 115.14,130.87 114,132 114,135.95 R10.1
  pour Top (no thermals): 114.5,135 113,135 113,147.5 114.5,147.5
S1  (via drill 0.35)
  Top 0.152: v46,35 45.48,35 | 45.48,35 | 45.48,35 35.52,35 | 35.52,35 | 35.52,35 v35,35 | U1.32 30.75,35.96 | 30.75,35.96 30.75,35.75 v31,35.5 | v125,127 124.47,127 | 124.47,127 | 124.47,127 122,127 IC1.4 | 45.48,35 45.83,34.75 | 45.83,34.75 | 45.48,35 | 45.48,35 45.83,35.25 | 45.83,35.25 | 45.48,35 45.83,34.75 | 45.83,34.75 | v46,35 45.83,34.75 | 45.48,35 45.83,35.25 | v46,35 45.83,35.25 | 45.48,35 45.83,34.75 | v46,35 45.83,34.75 | 45.48,35 45.83,35.25 | v46,35 45.83,35.25 | 35.52,35 | 35.52,35 35.17,35.25 | 35.17,35.25 | 35.52,35 35.17,34.75 | 35.17,34.75 | 35.52,35 35.17,35.25 | 35.17,35.25 | v35,35 35.17,35.25 | 35.52,35 35.17,34.75 | v35,35 35.17,34.75 | 35.52,35 35.17,35.25 | v35,35 35.17,35.25 | 35.52,35 35.17,34.75 | v35,35 35.17,34.75 | 30.75,35.96 30.7,35.53 v31,35.5 | 30.75,35.96 31.13,35.77 v31,35.5 | 124.47,127 | 124.47,127 124.83,126.75 | 124.83,126.75 | 124.47,127 124.83,127.25 | 124.83,127.25 | 124.47,127 124.83,126.75 | 124.83,126.75 | v125,127 124.83,126.75 | 124.47,127 124.83,127.25 | v125,127 124.83,127.25 | 124.47,127 124.83,126.75 | v125,127 124.83,126.75 | 124.47,127 124.83,127.25 | v125,127 124.83,127.25
  Flex2 0.152: v35,35 34.48,35 | 34.48,35 | 34.48,35 31.5,35 31.37,35.13 | 31.37,35.13 v31,35.5 | v46,35 46.52,35 | 46.52,35 | 46.52,35 114.5,35 arc90 125,45.5 125,126.47 | 125,126.47 | 125,126.47 v125,127 | 46.52,35 | 46.52,35 46.17,35.25 | 46.17,35.25 | 46.52,35 46.17,34.75 | 46.17,34.75 | 46.52,35 46.17,35.25 | 46.17,35.25 | v46,35 46.17,35.25 | 46.52,35 46.17,34.75 | v46,35 46.17,34.75 | 46.52,35 46.17,35.25 | v46,35 46.17,35.25 | 46.52,35 46.17,34.75 | v46,35 46.17,34.75 | 34.48,35 34.83,34.75 | 34.83,34.75 | 34.48,35 | 34.48,35 34.83,35.25 | 34.83,35.25 | 34.48,35 34.83,34.75 | 34.83,34.75 | v35,35 34.83,34.75 | 34.48,35 34.83,35.25 | v35,35 34.83,35.25 | 34.48,35 34.83,34.75 | v35,35 34.83,34.75 | 34.48,35 34.83,35.25 | v35,35 34.83,35.25 | 31.37,35.13 31.3,35.55 v31,35.5 | 31.37,35.13 30.95,35.2 v31,35.5 | 125,126.47 125.25,126.83 | 125.25,126.83 | 125,126.47 | 125,126.47 124.75,126.83 | 124.75,126.83 | 125,126.47 125.25,126.83 | 125.25,126.83 | v125,127 125.25,126.83 | 125,126.47 124.75,126.83 | v125,127 124.75,126.83 | 125,126.47 125.25,126.83 | v125,127 125.25,126.83 | 125,126.47 124.75,126.83 | v125,127 124.75,126.83
S2  (via drill 0.35)
  Top 0.152: U1.33 35.75,50.75 40.5,46 40.5,41 44.5,37 45.48,37 | 45.48,37 | 45.48,37 v46,37 | v123,128 122.63,128.37 | 122.63,128.37 122,129 122,131 120.86,132.13 IC1.2 | 45.48,37 45.83,36.75 | 45.83,36.75 | 45.48,37 | 45.48,37 45.83,37.25 | 45.83,37.25 | 45.48,37 45.83,36.75 | 45.83,36.75 | v46,37 45.83,36.75 | 45.48,37 45.83,37.25 | v46,37 45.83,37.25 | 45.48,37 45.83,36.75 | v46,37 45.83,36.75 | 45.48,37 45.83,37.25 | v46,37 45.83,37.25 | 122.63,128.37 122.7,127.95 v123,128 | 122.63,128.37 123.05,128.3 v123,128
  Flex2 0.152: v46,37 46.52,37 | 46.52,37 | 46.52,37 114,37 arc90 123,46 123,127.47 | 123,127.47 | 123,127.47 v123,128 | 46.52,37 | 46.52,37 46.17,37.25 | 46.17,37.25 | 46.52,37 46.17,36.75 | 46.17,36.75 | 46.52,37 46.17,37.25 | 46.17,37.25 | v46,37 46.17,37.25 | 46.52,37 46.17,36.75 | v46,37 46.17,36.75 | 46.52,37 46.17,37.25 | v46,37 46.17,37.25 | 46.52,37 46.17,36.75 | v46,37 46.17,36.75 | 123,127.47 123.25,127.83 | 123.25,127.83 | 123,127.47 | 123,127.47 122.75,127.83 | 122.75,127.83 | 123,127.47 123.25,127.83 | 123.25,127.83 | v123,128 123.25,127.83 | 123,127.47 122.75,127.83 | v123,128 122.75,127.83 | 123,127.47 123.25,127.83 | v123,128 123.25,127.83 | 123,127.47 122.75,127.83 | v123,128 122.75,127.83
VCC  (via drill 0.35, 1)
  Top 0.152: U1.19 24.25,49.88 | 24.25,49.88 24.25,50.35 v24.2,50.4 | U1.40 31.46,54.25 | 31.46,54.25 31.25,54.25 v31,54.5 | U1.25 27.25,50.04 | 27.25,50.04 27.25,50.25 v27,50.5 | U1.55 27.75,58.96 | 27.75,58.96 27.75,58.75 v27.5,58.5 | U1.46 31.75,57.25 31.37,56.87 | 31.37,56.87 v31,56.5 | U1.61 24.75,58.96 | 24.75,58.96 24.75,58.75 v24.5,58.5 | U1.6 22.54,55.75 | 22.54,55.75 22.75,55.75 v23,56 | U1.12 22.54,52.75 | 22.54,52.75 22.75,52.75 v23,53 | R5.2 R6.2 33,47.52 | 33,47.52 | 33,47.52 v33,47 | 24.25,49.88 24.46,50.25 v24.2,50.4 | 24.25,49.88 23.97,50.2 v24.2,50.4 | 31.46,54.25 31.27,54.63 v31,54.5 | 31.46,54.25 31.04,54.2 v31,54.5 | 27.25,50.04 27.3,50.47 v27,50.5 | 27.25,50.04 26.86,50.23 v27,50.5 | 27.75,58.96 27.36,58.77 v27.5,58.5 | 27.75,58.96 27.8,58.53 v27.5,58.5 | 31.37,56.87 30.95,56.8 v31,56.5 | 31.37,56.87 31.3,56.45 v31,56.5 | 24.75,58.96 24.36,58.77 v24.5,58.5 | 24.75,58.96 24.8,58.53 v24.5,58.5 | 22.54,55.75 22.96,55.7 v23,56 | 22.54,55.75 22.73,56.13 v23,56 | 22.54,52.75 22.96,52.7 v23,53 | 22.54,52.75 22.73,53.13 v23,53 | 33,47.52 | 33,47.52 32.75,47.17 | 32.75,47.17 | 33,47.52 33.25,47.17 | 33.25,47.17 | 33,47.52 32.75,47.17 | 32.75,47.17 | v33,47 32.75,47.17 | 33,47.52 33.25,47.17 | v33,47 33.25,47.17 | 33,47.52 32.75,47.17 | v33,47 32.75,47.17 | 33,47.52 33.25,47.17 | v33,47 33.25,47.17
  Flex2 2: 128,133 128,43.5 arc-90 116.5,32 47,32
  Bottom 0.152: v31,54.5 31.52,54.5 | 31.52,54.5 | 31.52,54.5 C5.1 | v27,50.5 27,49.98 | 27,49.98 | 27,49.98 C3.1 | v27.5,58.5 27.5,59.02 | 27.5,59.02 | 27.5,59.02 C7.1 | v23,56 22.48,56 | 22.48,56 | 22.48,56 C6.1 | v23,53 22.48,53 | 22.48,53 | 22.48,53 C4.1 | 31.52,54.5 31.17,54.75 | 31.17,54.75 | 31.52,54.5 | 31.52,54.5 31.17,54.25 | 31.17,54.25 | 31.52,54.5 31.17,54.75 | 31.17,54.75 | v31,54.5 31.17,54.75 | 31.52,54.5 31.17,54.25 | v31,54.5 31.17,54.25 | 31.52,54.5 31.17,54.75 | v31,54.5 31.17,54.75 | 31.52,54.5 31.17,54.25 | v31,54.5 31.17,54.25 | 27,49.98 27.25,50.33 | 27.25,50.33 | 27,49.98 | 27,49.98 26.75,50.33 | 26.75,50.33 | 27,49.98 27.25,50.33 | 27.25,50.33 | v27,50.5 27.25,50.33 | 27,49.98 26.75,50.33 | v27,50.5 26.75,50.33 | 27,49.98 27.25,50.33 | v27,50.5 27.25,50.33 | 27,49.98 26.75,50.33 | v27,50.5 26.75,50.33 | 27.5,59.02 | 27.5,59.02 27.25,58.67 | 27.25,58.67 | 27.5,59.02 27.75,58.67 | 27.75,58.67 | 27.5,59.02 27.25,58.67 | 27.25,58.67 | v27.5,58.5 27.25,58.67 | 27.5,59.02 27.75,58.67 | v27.5,58.5 27.75,58.67 | 27.5,59.02 27.25,58.67 | v27.5,58.5 27.25,58.67 | 27.5,59.02 27.75,58.67 | v27.5,58.5 27.75,58.67 | 22.48,56 | 22.48,56 22.83,55.75 | 22.83,55.75 | 22.48,56 22.83,56.25 | 22.83,56.25 | 22.48,56 22.83,55.75 | 22.83,55.75 | v23,56 22.83,55.75 | 22.48,56 22.83,56.25 | v23,56 22.83,56.25 | 22.48,56 22.83,55.75 | v23,56 22.83,55.75 | 22.48,56 22.83,56.25 | v23,56 22.83,56.25 | 22.48,53 | 22.48,53 22.83,52.75 | 22.83,52.75 | 22.48,53 22.83,53.25 | 22.83,53.25 | 22.48,53 22.83,52.75 | 22.83,52.75 | v23,53 22.83,52.75 | 22.48,53 22.83,53.25 | v23,53 22.83,53.25 | 22.48,53 22.83,52.75 | v23,53 22.83,52.75 | 22.48,53 22.83,53.25 | v23,53 22.83,53.25
  other vias: 25.5,135 28.5,135 28.5,131 25.5,131 23,129.5 19,129.5 118,136 119,135 125,138 136.5,135.5 141.5,134
  pour Flex2: 11,13.5 48.5,13.5 48.5,140.5 11,140.5
  pour Top (no thermals): 30.5,138 17,138 17,128 30.5,128
  pour Top (no thermals): 143,136.5 133.5,136.5 133.5,135.5 135.5,133.5 137.5,131.5 143,131.5
  pour Flex2 (no thermals): 101,149 149,149 149,131 101,131
  pour Top (no thermals): 115.5,136.5 120,136.5 120,133 117.5,133 115.5,135
  pour Top (no thermals): 124.5,135 125.5,135 125.5,138.5 124.5,138.5

## Text on the board
Top: Top | 1
Flex1: Flex1 | 2
Flex2: Flex2 | 3
Bottom: Bottom | 4
tPlace: Rigid flex HDMI switch | KU Leuven Campus Group T | Vincent Vansant
Document: 1Ri-2F-1Ri 0.744mm Rigid-Flex WE Build | 15um Soldermask IPC-SM840 -> Epsilon_r 3.5 | Layer 1 - HS Digital -> 30um (1/4 oz) copper | 105um Prepreg IPC-4101/127/128 -> Epsilon_r 3.8 / 180um Prepreg IPC-4101/127/128 -> Epsilon_r 3.9 | Layer 2 - HS GND + Flex Signal -> 17um ED Base Copper | 50um Flexible Core IPC-4204/11 -> Epsilon_r 3.4 | Layer 15 - VCC -> 17um ED Base Copper | 180um Prepreg IPC-4101/127/128 -> Epsilon_r 3.9 / 105um Prepreg IPC-4101/127/128 -> Epsilon_r 3.8 | Layer 16 - Signal/+5V -> 30um (1/4 oz) copper | 15um Soldermask IPC-SM840 -> Epsilon_r 3.5 | Surface Edge-Coupled Stripline Impedance Control: / 100 Ohm Differential - 260um (width), 150um (clearance/space) | flex outline - layer 113 / rigid outline - layer 114